# Altium PCB Sampler_DIOT.PCBDOC (part 6 of 10)
Units mm, origin at the board's own origin, x right, y up, seen from the top; angles counter-clockwise.
Board outline 222.9 x 100 mm, 4 copper layers (L1, P2, L3, L4), stack 1.6 mm thick; 697 components, 418 nets, 2175 pads, 1124 vias.
Unrouted connection lines stored in the file: 6.
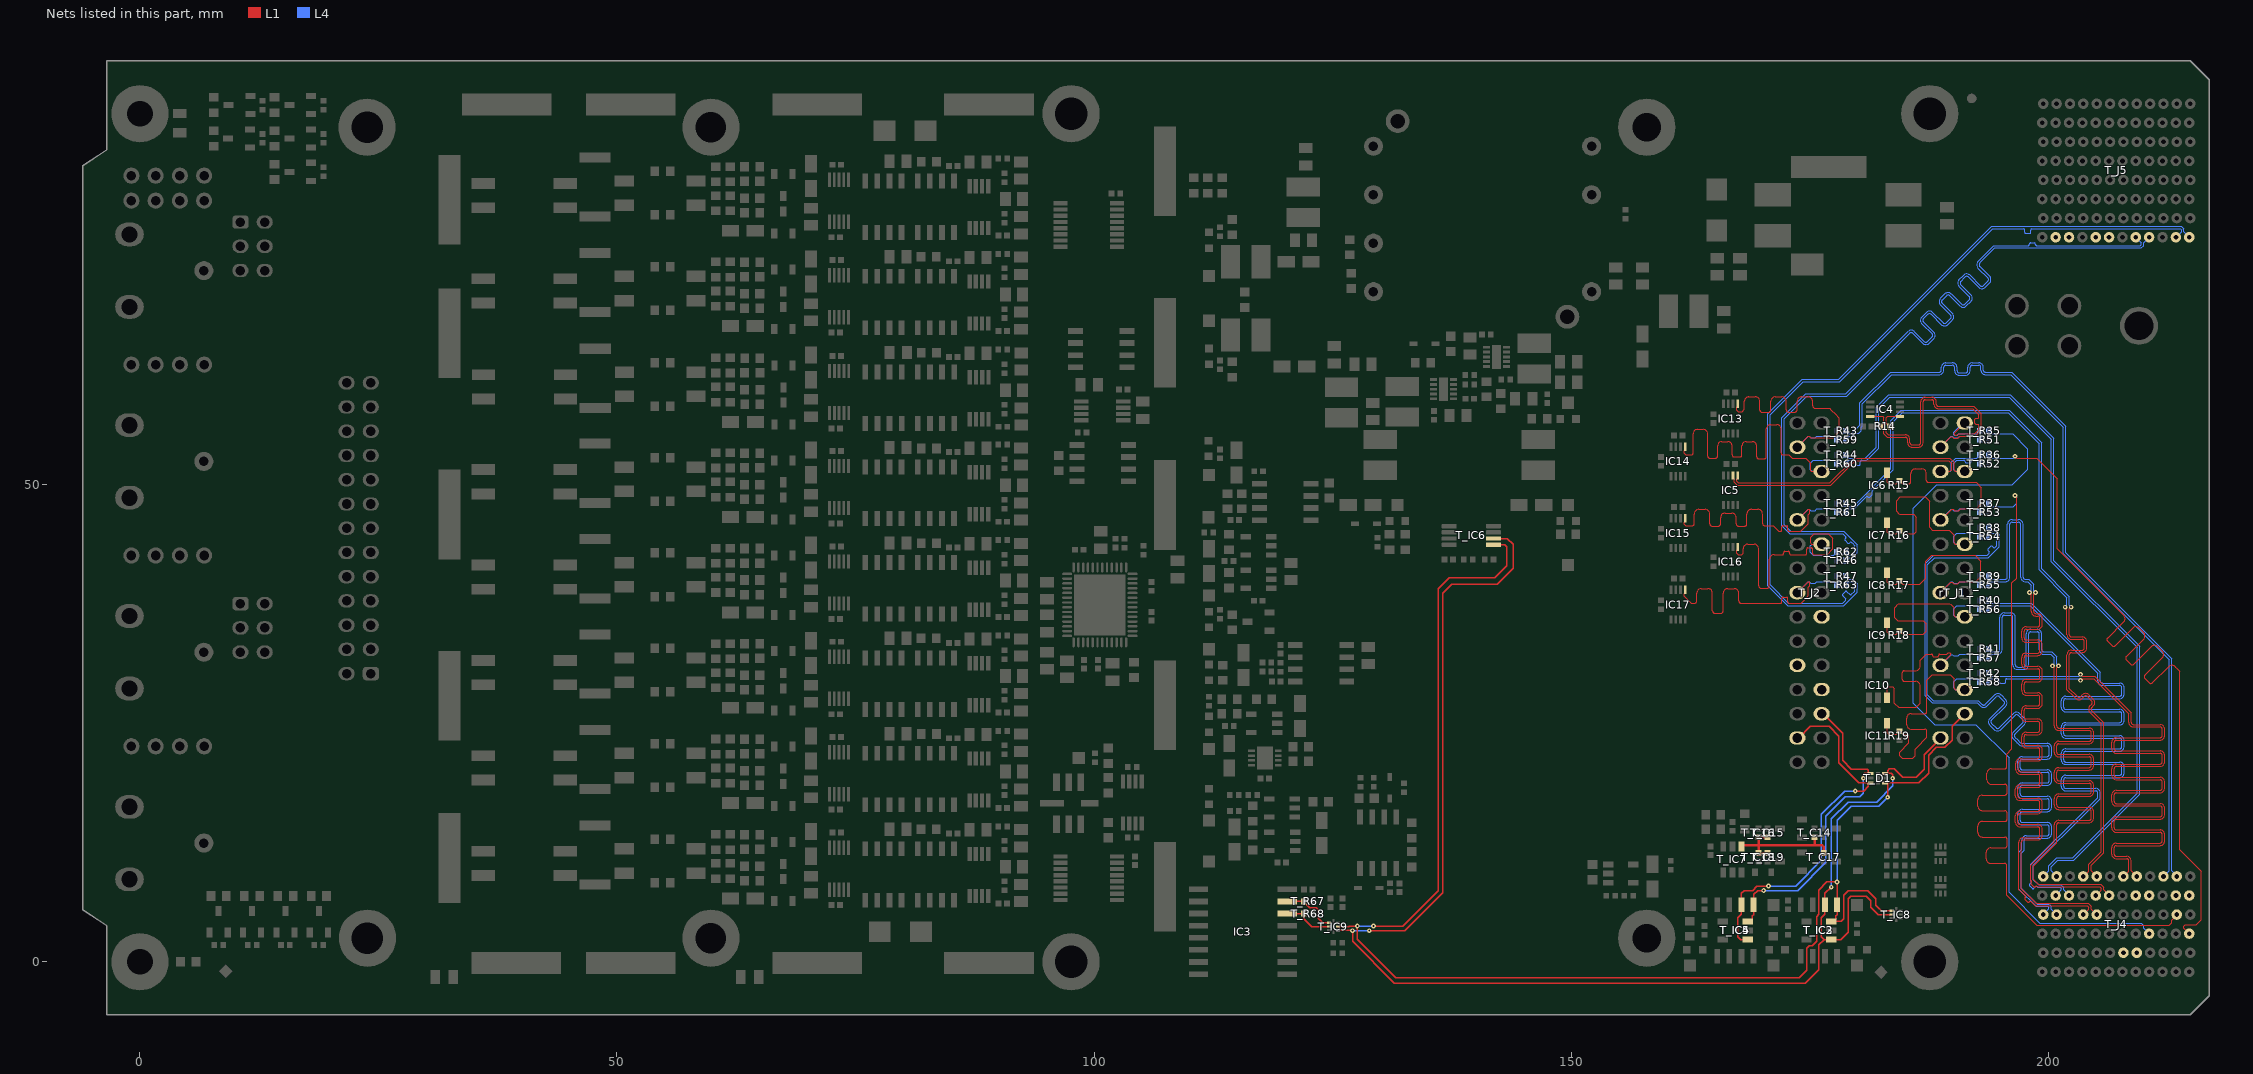
[diagram p6: the nets of this part, all layers, seen from the top]

## Via types
v1: diameter 0.5, hole 0.2, L1 to L4, tented both sides, 1103 vias
v2: diameter 1, hole 0.6, L1 to L4, tented both sides, 15 vias
v3: diameter 0.6, hole 0.3, L1 to L4, tented both sides, 6 vias

## Nets (pads, with @x,y where several pads share a name; then routed paths per layer and width w, separated by ;. In a path a pad name is that pad's centre, name@x,y a point inside that pad or via, vN(x,y) a via of type N, cw(c..) or ccw(c..) an arc to the next point about the centre after c; other vN are vias at no path point) (continued)
BP_IO.LVDS_N3: T_J4.L4 T_R54.1 | length 89.3
  L4 w0.127: T_R54.1@193.796,44.589 193.796,44.609 194.117,44.93 194.392,44.93 194.65,44.672 194.65,43.785 194.65,43.63 194.449,43.428 cw(c194.359,43.518) 194.269,43.428 194.154,43.544 ccw(c194.065,43.455) 193.976,43.544 193.71,43.278 ccw(c193.799,43.189) 193.71,43.101 193.826,42.985 cw(c193.736,42.895) 193.826,42.806 193.781,42.761 193.647,42.627 188.002,42.627 187.108,41.733 187.108,27.867 187.839,27.136 192.589,27.136 192.788,26.937 192.886,26.839 192.923,26.802 ccw(c193.262,27.141) 193.601,26.802 194.589,27.791 cw(c194.748,27.631) 194.908,27.789 195.385,27.313 cw(c195.226,27.152) 195.385,26.993 193.891,25.499 ccw(c194.229,25.159) 193.89,24.82 194.368,24.342 ccw(c194.707,24.681) 195.046,24.342 196.542,25.838 cw(c196.701,25.678) 196.861,25.836 ; 196.861,25.836 197.338,25.36 ; 196.874,22.851 196.761,22.964 196.743,22.982 196.724,23.001 196.645,23.08 196.351,23.374 cw(c196.69,23.713) 196.351,24.052 197.338,25.04 ccw(c197.179,25.199) 197.338,25.359 ; 196.875,22.85 ccw(c197.389,23.367) 197.389,22.638 199.9,22.638 cw(c199.9,22.413) 200.125,22.413 200.125,21.736 cw(c199.9,21.736) 199.9,21.511 197.304,21.511 ccw(c197.304,21.032) 196.825,21.032 196.825,20.355 ccw(c197.304,20.355) 197.304,19.876 199.9,19.876 cw(c199.9,19.651) 200.125,19.651 200.125,18.974 cw(c199.9,18.974) 199.9,18.749 197.304,18.749 ccw(c197.304,18.27) 196.825,18.27 196.825,17.593 ccw(c197.304,17.593) 197.304,17.114 199.9,17.114 cw(c199.9,16.889) 200.125,16.889 200.125,16.212 cw(c199.9,16.212) 199.9,15.987 197.304,15.987 ccw(c197.304,15.508) 196.825,15.508 196.825,14.831 ccw(c197.304,14.831) 197.304,14.352 199.9,14.352 cw(c199.9,14.127) 200.125,14.127 200.125,13.45 cw(c199.9,13.45) 199.9,13.225 197.726,13.225 ccw(c197.726,12.746) 197.247,12.746 197.247,11.781 196.931,11.465 196.931,11.067 196.931,7.618 198.745,5.803 199.981,5.803 200.093,5.691 200.093,5.543 T_J4.L4@199.5,4.95
BP_IO.LVDS_N4: T_J4.I4 T_R55.1 | length 90.2
  L1 w0.127: v1(198.059,38.699) 198.07,38.699 198.246,38.522 198.246,36.917 198.246,36.727 ccw(c198.725,36.727) 198.725,36.247 198.913,36.247 cw(c198.913,36.022) 199.139,36.022 199.139,35.346 cw(c198.913,35.346) 198.913,35.12 197.709,35.12 ccw(c197.709,34.641) 197.229,34.641 197.229,33.965 ccw(c197.709,33.965) 197.709,33.485 198.913,33.485 cw(c198.913,33.26) 199.139,33.26 199.139,32.584 cw(c198.913,32.584) 198.913,32.358 197.709,32.358 ccw(c197.709,31.879) 197.229,31.879 197.229,31.203 ccw(c197.709,31.203) 197.709,30.723 198.913,30.723 cw(c198.913,30.498) 199.139,30.498 199.139,29.822 cw(c198.913,29.822) 198.913,29.596 197.709,29.596 ccw(c197.709,29.117) 197.229,29.117 197.229,28.441 ccw(c197.709,28.441) 197.709,27.961 198.913,27.961 cw(c198.913,27.736) 199.139,27.736 199.139,27.06 cw(c198.913,27.06) 198.913,26.834 197.709,26.834 ccw(c197.709,26.355) 197.229,26.355 197.229,25.679 ccw(c197.709,25.679) 197.709,25.199 198.913,25.199 cw(c198.913,24.974) 199.139,24.974 199.139,24.298 cw(c198.913,24.298) 198.913,24.072 197.709,24.072 ccw(c197.709,23.593) 197.229,23.593 197.229,22.917 ccw(c197.709,22.917) 197.709,22.437 198.913,22.437 cw(c198.913,22.212) 199.139,22.212 199.139,21.536 cw(c198.913,21.536) 198.913,21.31 197.095,21.31 ccw(c197.095,20.831) 196.616,20.831 196.616,20.155 ccw(c197.095,20.155) 197.095,19.675 198.913,19.675 cw(c198.913,19.45) 199.139,19.45 199.139,18.774 cw(c198.913,18.774) 198.913,18.548 197.053,18.548 ccw(c197.053,18.069) 196.574,18.069 196.574,17.393 ccw(c197.053,17.393) 197.053,16.913 198.913,16.913 cw(c198.913,16.688) 199.139,16.688 199.139,16.012 cw(c198.913,16.012) 198.913,15.786 197.053,15.786 ccw(c197.053,15.307) 196.574,15.307 196.574,14.631 ccw(c197.053,14.631) 197.053,14.151 198.913,14.151 cw(c198.913,13.926) 199.139,13.926 199.139,13.25 cw(c198.913,13.25) 198.913,13.024 197.425,13.024 ccw(c197.425,12.545) 196.946,12.545 196.946,10.175 196.946,7.579 197.1,7.425 197.145,7.38 197.614,6.911 cw(c197.524,6.821) 197.614,6.731 197.589,6.706 ccw(c197.677,6.617) 197.589,6.528 197.855,6.262 ccw(c197.943,6.351) 198.032,6.262 198.058,6.288 cw(c198.147,6.198) 198.237,6.288 198.282,6.243 198.652,5.873 204.099,5.873 204.262,5.709 204.262,5.512 T_J4.I4@203.7,4.95
  L4 w0.127: T_R55.1@193.796,39.509 193.796,39.529 194.117,39.85 195.333,39.85 195.523,39.85 ccw(c195.523,40.33) 196.003,40.33 196.003,45.861 cw(c196.228,45.861) 196.228,46.086 196.904,46.086 cw(c196.904,45.861) 197.13,45.861 197.13,40.33 ccw(c197.609,40.33) 197.609,39.85 197.86,39.85 198.232,39.479 198.246,39.465 198.246,38.875 198.07,38.699 v1(198.059,38.699)
BP_IO.LVDS_N5: T_J4.K5 T_R56.1 | length 92.5
  L4 w0.127: T_R56.1@193.796,36.969 193.796,36.989 194.117,37.31 198.138,37.31 205.221,30.228 205.221,29.641 205.221,29.45 ccw(c205.7,29.45) 205.7,28.971 207.506,28.971 cw(c207.506,28.745) 207.732,28.745 207.732,28.069 cw(c207.506,28.069) 207.506,27.844 201.856,27.844 ccw(c201.856,27.364) 201.376,27.364 201.376,26.688 ccw(c201.856,26.688) 201.856,26.209 207.506,26.209 cw(c207.506,25.983) 207.732,25.983 207.732,25.307 cw(c207.506,25.307) 207.506,25.082 201.856,25.082 ccw(c201.856,24.602) 201.376,24.602 201.376,23.926 ccw(c201.856,23.926) 201.856,23.447 207.506,23.447 cw(c207.506,23.221) 207.732,23.221 207.732,22.545 cw(c207.506,22.545) 207.506,22.32 201.856,22.32 ccw(c201.856,21.84) 201.376,21.84 201.376,21.164 ccw(c201.856,21.164) 201.856,20.685 207.506,20.685 cw(c207.506,20.459) 207.732,20.459 207.732,19.783 cw(c207.506,19.783) 207.506,19.558 201.856,19.558 ccw(c201.856,19.078) 201.376,19.078 201.376,18.402 ccw(c201.856,18.402) 201.856,17.923 204.996,17.923 cw(c204.996,17.697) 205.221,17.697 205.221,17.216 203.905,15.9 198.208,10.203 198.208,8.866 198.208,8.502 198.23,8.479 cw(c198.141,8.389) 198.23,8.299 198.071,8.14 ccw(c198.16,8.052) 198.071,7.963 198.337,7.697 ccw(c198.426,7.786) 198.515,7.697 198.674,7.856 cw(c198.764,7.766) 198.853,7.856 198.898,7.811 198.906,7.803 201.281,7.803 201.393,7.691 201.393,7.543 T_J4.K5@200.8,6.95
BP_IO.LVDS_N6: T_J4.H5 T_R57.1 | length 84.2
  L1 w0.127: v1(200.467,31.024) 200.477,31.024 200.653,30.847 200.653,30 200.653,24.726 ccw(c201.133,24.726) 201.133,24.247 204.305,24.247 cw(c204.305,24.022) 204.531,24.022 204.531,23.345 cw(c204.305,23.345) 204.305,23.12 201.127,23.12 ccw(c201.127,22.641) 200.648,22.641 200.648,21.964 ccw(c201.127,21.964) 201.127,21.485 204.305,21.485 cw(c204.305,21.26) 204.531,21.26 204.531,20.583 cw(c204.305,20.583) 204.305,20.358 201.127,20.358 ccw(c201.127,19.879) 200.648,19.879 200.648,19.202 ccw(c201.127,19.202) 201.127,18.723 204.305,18.723 cw(c204.305,18.498) 204.531,18.498 204.531,17.821 cw(c204.305,17.821) 204.305,17.596 201.127,17.596 ccw(c201.127,17.117) 200.648,17.117 200.648,16.44 ccw(c201.127,16.44) 201.127,15.961 204.305,15.961 cw(c204.305,15.736) 204.531,15.736 204.531,15.059 cw(c204.305,15.059) 204.305,14.834 201.133,14.834 ccw(c201.133,14.355) 200.653,14.355 200.653,12.783 200.653,12.566 198.213,10.125 198.213,8.919 198.213,8.528 198.231,8.51 cw(c198.141,8.42) 198.231,8.33 198.22,8.32 ccw(c198.309,8.231) 198.22,8.142 198.486,7.876 ccw(c198.575,7.965) 198.663,7.876 198.674,7.887 cw(c198.764,7.797) 198.854,7.887 198.868,7.873 198.93,7.873 205.399,7.873 205.562,7.709 205.562,7.512 T_J4.H5@205,6.95
  L4 w0.127: T_R57.1@193.796,31.889 193.796,31.909 194.117,32.23 194.525,32.23 194.716,32.23 ccw(c194.716,32.71) 195.195,32.71 195.195,36.105 cw(c195.42,36.105) 195.42,36.33 196.097,36.33 cw(c196.097,36.105) 196.322,36.105 196.322,31.127 ccw(c196.801,31.127) 196.801,30.647 197.478,30.647 ccw(c197.478,31.127) 197.957,31.127 197.957,34.367 cw(c198.182,34.367) 198.182,34.592 198.859,34.592 cw(c198.859,34.367) 199.084,34.367 199.084,32.71 ccw(c199.563,32.71) 199.563,32.23 200.285,32.23 200.475,32.041 200.653,31.863 200.653,31.2 200.477,31.024 v1(200.467,31.024)
BP_IO.LVDS_N7: T_J4.F6 T_R58.1 | length 84.2
  L1 w0.127: v1(203.401,29.504) 203.401,29.514 203.578,29.69 204.773,29.69 208.462,26.001 208.462,25.289 208.462,25.098 ccw(c208.942,25.098) 208.942,24.619 211.737,24.619 cw(c211.737,24.393) 211.963,24.393 211.963,23.717 cw(c211.737,23.717) 211.737,23.492 207.154,23.492 ccw(c207.154,23.012) 206.675,23.012 206.675,22.336 ccw(c207.154,22.336) 207.154,21.857 211.737,21.857 cw(c211.737,21.631) 211.963,21.631 211.963,20.955 cw(c211.737,20.955) 211.737,20.73 207.154,20.73 ccw(c207.154,20.25) 206.675,20.25 206.675,19.574 ccw(c207.154,19.574) 207.154,19.095 211.737,19.095 cw(c211.737,18.869) 211.963,18.869 211.963,18.193 cw(c211.737,18.193) 211.737,17.968 207.154,17.968 ccw(c207.154,17.488) 206.675,17.488 206.675,16.812 ccw(c207.154,16.812) 207.154,16.333 211.737,16.333 cw(c211.737,16.107) 211.963,16.107 211.963,15.431 cw(c211.737,15.431) 211.737,15.206 207.154,15.206 ccw(c207.154,14.726) 206.675,14.726 206.675,14.05 ccw(c207.154,14.05) 207.154,13.571 211.737,13.571 cw(c211.737,13.345) 211.963,13.345 211.963,12.669 cw(c211.737,12.669) 211.737,12.444 207.154,12.444 ccw(c207.154,11.964) 206.675,11.964 206.675,11.288 ccw(c207.154,11.288) 207.154,10.809 208.237,10.809 cw(c208.237,10.583) 208.462,10.583 208.462,10.004 208.462,9.512 T_J4.F6@207.9,8.95
  L4 w0.127: T_R58.1@193.796,29.349 193.796,29.369 194.1,29.673 194.117,29.69 194.791,29.69 cw(c194.791,29.563) 194.918,29.563 194.918,29.305 ccw(c195.043,29.305) 195.043,29.179 195.419,29.179 ccw(c195.419,29.305) 195.545,29.305 195.545,29.563 cw(c195.672,29.563) 195.672,29.69 195.971,29.69 203.225,29.69 203.401,29.514 v1(203.401,29.504)
BP_IO.LVDS_N8: T_J4.C6 T_R59.1 | length 84.3
  L4 w0.127: T_R59.1@178.796,54.749 178.796,54.769 179.008,54.981 179.117,55.09 179.47,55.09 179.798,55.419 179.975,55.419 179.978,55.416 180.155,55.416 180.421,55.682 180.421,55.86 180.419,55.862 180.419,56.039 180.527,56.148 180.527,56.187 180.527,58.479 183.596,61.549 188.409,61.549 188.599,61.549 ccw(c188.599,62.028) 189.079,62.028 189.079,62.309 cw(c189.304,62.309) 189.304,62.534 189.98,62.534 cw(c189.98,62.309) 190.206,62.309 190.206,61.967 ccw(c190.685,61.967) 190.685,61.487 191.361,61.487 ccw(c191.361,61.967) 191.841,61.967 191.841,62.309 cw(c192.066,62.309) 192.066,62.534 192.742,62.534 cw(c192.742,62.309) 192.968,62.309 192.968,62.028 ccw(c193.447,62.028) 193.447,61.549 195.128,61.549 196.089,61.549 201.6,56.038 201.6,42.766 212.693,31.672 212.693,9.543 T_J4.C6@212.1,8.95
BP_IO.LVDS_N9: T_J4.L6 T_R60.1 | length 84.2
  L4 w0.127: T_R60.1@178.796,52.209 178.796,52.229 179.086,52.519 179.117,52.55 179.676,52.55 cw(c179.676,52.423) 179.803,52.423 179.803,52.179 ccw(c179.909,52.179) 179.909,52.073 180.225,52.073 ccw(c180.225,52.179) 180.33,52.179 180.33,52.423 cw(c180.457,52.423) 180.457,52.55 180.735,52.55 180.962,52.55 181.111,52.699 182.103,53.691 182.252,53.84 182.252,58.04 183.412,59.2 195.949,59.2 200.357,54.792 200.357,41.959 209.359,32.957 209.359,17.644 202.608,10.893 200.923,10.893 200.093,10.064 200.093,9.543 T_J4.L6@199.5,8.95
BP_IO.LVDS_N10: T_J4.I6 T_R61.1 | length 82.6
  L1 w0.127: v1(201.798,37.174) 201.809,37.174 201.985,36.997 201.985,34.469 201.985,34.278 ccw(c202.464,34.278) 202.464,33.799 203.582,33.799 cw(c203.582,33.573) 203.807,33.573 203.807,32.897 cw(c203.582,32.897) 203.582,32.672 202.464,32.672 ccw(c202.464,32.192) 201.985,32.192 201.985,31.538 201.985,28.54 202.625,27.9 202.778,27.747 202.875,27.65 202.912,27.613 ccw(c203.251,27.952) 203.59,27.613 203.788,27.811 cw(c203.948,27.651) 204.107,27.811 204.585,27.332 cw(c204.426,27.173) 204.585,27.014 ; T_J4.I6@203.7,8.95 204.262,9.512 204.262,10.222 205.575,11.534 205.575,24.95 205.453,25.072 205.355,25.17 204.387,26.138 cw(c204.726,26.477) 204.387,26.816 204.585,27.013
  L4 w0.127: T_R61.1@178.796,47.129 178.796,47.149 179.117,47.47 179.675,47.47 180.44,48.235 180.928,48.723 cw(c181.018,48.634) 181.108,48.723 181.12,48.711 ccw(c181.209,48.8) 181.297,48.711 181.563,48.977 ccw(c181.475,49.066) 181.563,49.154 181.551,49.167 cw(c181.641,49.257) 181.551,49.346 181.748,49.544 183.77,51.566 183.77,56.63 184.694,57.554 195.805,57.554 199.065,54.294 199.065,41.076 201.985,38.156 201.985,37.35 201.809,37.174 v1(201.798,37.174)
BP_IO.LVDS_N11: T_J5.E1 T_R62.1 | length 84.1
  L4 w0.127: T_R62.1@178.796,42.971 178.796,42.951 179.117,42.629 179.418,42.629 179.651,42.862 179.741,42.953 179.741,43.621 179.456,43.906 179.411,43.951 ccw(c179.321,43.861) 179.231,43.951 179.178,43.898 cw(c179.09,43.986) 179.001,43.898 178.735,44.164 cw(c178.824,44.252) 178.735,44.341 178.788,44.394 ccw(c178.698,44.484) 178.788,44.574 178.688,44.673 178.643,44.718 178.485,44.876 172.902,44.876 172.085,45.694 172.085,47.284 172.09,47.289 172.09,57.024 174.595,59.529 178.779,59.529 184.334,65.084 185.319,66.069 cw(c185.658,65.73) 185.955,66.106 185.96,66.106 185.997,66.07 ; 185.997,66.069 187.045,65.021 ccw(c187.205,65.18) 187.364,65.021 187.842,65.499 ccw(c187.683,65.659) 187.842,65.818 ; 187.841,65.819 186.76,66.9 cw(c187.098,67.24) 186.76,67.58 187.238,68.057 cw(c187.577,67.718) 187.874,68.094 187.878,68.094 188.998,66.974 ccw(c189.158,67.133) 189.317,66.974 189.795,67.452 ccw(c189.636,67.612) 189.795,67.771 ; 189.794,67.772 188.713,68.853 cw(c189.051,69.193) 188.713,69.533 189.191,70.01 cw(c189.53,69.671) 189.827,70.047 189.831,70.047 190.951,68.927 ccw(c191.111,69.087) 191.27,68.927 191.748,69.405 ccw(c191.589,69.565) 191.748,69.724 ; 191.747,69.725 190.666,70.806 cw(c191.004,71.146) 190.666,71.486 191.144,71.963 cw(c191.483,71.624) 191.78,72 191.784,72 192.904,70.88 ccw(c193.064,71.04) 193.223,70.88 193.701,71.358 ccw(c193.542,71.518) 193.701,71.677 ; 193.7,71.678 192.653,72.725 cw(c192.992,73.064) 192.653,73.403 192.788,73.538 194.326,75.076 197.858,75.076 197.921,75.076 ccw(c197.921,75.203) 198.048,75.203 198.048,75.226 cw(c198.174,75.226) 198.174,75.352 198.55,75.352 cw(c198.55,75.226) 198.675,75.226 198.675,75.203 ccw(c198.802,75.203) 198.802,75.076 199.18,75.076 209.681,75.076 209.793,75.188 209.793,75.357 T_J5.E1@209.2,75.95
BP_IO.LVDS_N12: T_J5.B1 T_R63.1 | length 84
  L4 w0.127: T_R63.1@178.796,39.509 178.796,39.529 179.117,39.85 179.418,39.85 179.651,39.617 179.741,39.527 179.741,39.06 179.741,38.859 179.399,38.517 cw(c179.309,38.607) 179.219,38.517 178.926,38.811 ccw(c178.837,38.722) 178.748,38.811 178.482,38.545 ccw(c178.571,38.456) 178.482,38.367 178.776,38.074 cw(c178.686,37.984) 178.776,37.894 178.486,37.604 178.342,37.604 172.795,37.604 170.875,39.523 170.875,57.35 174.342,60.817 178.188,60.817 194.195,76.824 196.743,76.824 197.433,76.824 cw(c197.433,76.697) 197.56,76.697 197.56,76.467 ccw(c197.686,76.467) 197.686,76.342 198.062,76.342 ccw(c198.062,76.467) 198.187,76.467 198.187,76.697 cw(c198.314,76.697) 198.314,76.824 198.85,76.824 199.131,76.824 213.881,76.824 213.993,76.712 213.993,76.543 T_J5.B1@213.4,75.95
BP_IO.LVDS_N13: T_J5.K1
BP_IO.LVDS_N14: T_J5.H1
BP_IO.LVDS_N15: T_J4.F2
BP_IO.LVDS_P0: T_J4.D3 T_R35.1 | length 84.3
  L4 w0.127: T_R35.1@193.796,55.668 193.796,55.648 194.023,55.422 194.043,55.422 194.12,55.344 196.277,55.344 197.783,53.839 197.857,53.764 197.857,51.61 196.243,49.996 188.314,49.996 185.867,47.549 185.867,27.129 188.141,24.854 192.438,24.854 195.92,21.372 195.92,21.267 195.92,7.27 199.133,4.057 209.786,4.057 210.047,3.796 210.047,3.531 210.6,2.978 T_J4.D3@210.6,2.95
BP_IO.LVDS_P1: T_J4.A3 T_R36.1 | length 81.6
  L1 w0.127: v1(196.551,52.991) 196.551,52.981 196.728,52.804 198.805,52.804 200.978,50.631 200.978,43.272 207.035,37.215 207.133,37.117 207.934,36.316 207.972,36.278 207.972,36.274 cw(c207.595,35.977) 207.934,35.638 206.237,33.94 ccw(c206.397,33.781) 206.237,33.622 206.716,33.144 ccw(c206.875,33.303) 207.034,33.144 208.867,34.976 cw(c209.207,34.638) 209.504,35.014 209.508,35.014 209.545,34.978 210.024,34.499 ; 210.024,34.498 210.061,34.462 210.061,34.457 cw(c209.685,34.16) 210.024,33.821 208.19,31.987 ccw(c208.35,31.828) 208.19,31.669 208.669,31.191 ccw(c208.828,31.35) 208.987,31.191 210.82,33.023 cw(c211.16,32.685) 211.457,33.061 211.461,33.061 211.498,33.025 211.977,32.546 212.014,32.509 212.014,32.504 cw(c211.638,32.207) 211.977,31.868 210.143,30.034 ccw(c210.303,29.875) 210.143,29.716 210.622,29.238 ccw(c210.781,29.397) 210.94,29.238 212.637,30.935 cw(c212.976,30.596) 213.273,30.972 213.278,30.972 213.315,30.935 ; 213.315,30.935 213.352,30.898 213.45,30.8 213.751,30.499 213.825,30.425 213.825,11.75 216.065,9.51 216.065,4.387 215.551,3.873 214.401,3.873 214.238,3.709 214.238,3.512 T_J4.A3@214.8,2.95
  L4 w0.127: T_R36.1@193.796,53.128 193.796,53.108 194.023,52.882 194.043,52.882 194.12,52.804 196.375,52.804 196.551,52.981 v1(196.551,52.991)
BP_IO.LVDS_P2: T_J4.B4 T_R37.1 | length 84.6
  L1 w0.127: v1(196.524,48.882) 196.524,48.795 196.699,48.621 196.699,40.224 196.222,39.747 196.222,22.328 195.673,21.778 195.673,21.113 195.673,20.464 cw(c195.448,20.464) 195.448,20.238 194.07,20.238 ccw(c194.07,19.759) 193.59,19.759 193.59,19.083 ccw(c194.07,19.083) 194.07,18.603 195.484,18.603 cw(c195.484,18.378) 195.71,18.378 195.71,17.702 cw(c195.484,17.702) 195.484,17.476 193.124,17.476 ccw(c193.124,16.997) 192.645,16.997 192.645,16.321 ccw(c193.124,16.321) 193.124,15.841 195.484,15.841 cw(c195.484,15.616) 195.71,15.616 195.71,14.94 cw(c195.484,14.94) 195.484,14.714 193.124,14.714 ccw(c193.124,14.235) 192.645,14.235 192.645,13.559 ccw(c193.124,13.559) 193.124,13.079 195.484,13.079 cw(c195.484,12.854) 195.71,12.854 195.71,12.178 cw(c195.484,12.178) 195.484,11.952 194.003,11.952 ccw(c194.003,11.473) 193.523,11.473 193.523,10.797 ccw(c194.003,10.797) 194.003,10.317 195.448,10.317 cw(c195.448,10.092) 195.673,10.092 195.673,9.901 195.673,6.977 198.807,3.843 212.686,3.843 212.947,4.104 212.947,4.369 213.5,4.922 T_J4.B4@213.5,4.95
  L4 w0.127: T_R37.1@193.796,48.048 193.796,48.028 194.023,47.802 194.043,47.802 194.12,47.724 196.344,47.724 196.711,48.091 196.711,48.705 196.535,48.882 v1(196.524,48.882)
BP_IO.LVDS_P3: T_J4.K4 T_R38.1 | length 89.1
  L4 w0.127: T_R38.1@193.796,45.508 193.796,45.488 194.023,45.262 194.043,45.262 194.12,45.184 194.497,45.184 194.904,44.778 194.904,43.524 193.753,42.373 188.107,42.373 187.362,41.628 187.362,27.972 187.944,27.39 192.694,27.39 192.968,27.117 193.065,27.019 193.102,26.982 ccw(c193.262,27.141) 193.421,26.982 194.408,27.969 ; 194.408,27.969 cw(c194.748,27.631) 195.045,28.007 195.05,28.007 195.086,27.97 ; 195.087,27.97 195.565,27.491 ; 195.566,27.491 195.602,27.454 195.602,27.45 cw(c195.226,27.152) 195.565,26.813 194.069,25.317 ccw(c194.229,25.159) 194.07,24.999 194.548,24.521 ccw(c194.707,24.681) 194.867,24.521 196.361,26.016 ; 196.362,26.016 cw(c196.701,25.678) 196.998,26.054 197.003,26.054 197.039,26.017 ; 197.04,26.017 197.518,25.538 ; 197.519,25.538 197.555,25.501 197.555,25.497 cw(c197.179,25.199) 197.518,24.86 196.53,23.873 ccw(c196.69,23.713) 196.53,23.554 196.825,23.259 196.922,23.162 196.952,23.132 197.052,23.032 197.055,23.029 ccw(c197.389,23.367) 197.389,22.892 199.9,22.892 cw(c199.9,22.413) 200.379,22.413 200.379,21.736 cw(c199.9,21.736) 199.9,21.257 197.304,21.257 ccw(c197.304,21.032) 197.079,21.032 197.079,20.355 ccw(c197.304,20.355) 197.304,20.13 199.9,20.13 cw(c199.9,19.651) 200.379,19.651 200.379,18.974 cw(c199.9,18.974) 199.9,18.495 197.304,18.495 ccw(c197.304,18.27) 197.079,18.27 197.079,17.593 ccw(c197.304,17.593) 197.304,17.368 199.9,17.368 cw(c199.9,16.889) 200.379,16.889 200.379,16.212 cw(c199.9,16.212) 199.9,15.733 197.304,15.733 ccw(c197.304,15.508) 197.079,15.508 197.079,14.831 ccw(c197.304,14.831) 197.304,14.606 199.9,14.606 cw(c199.9,14.127) 200.379,14.127 200.379,13.45 cw(c199.9,13.45) 199.9,12.971 197.726,12.971 ccw(c197.726,12.746) 197.501,12.746 197.501,11.676 197.185,11.36 197.185,11.067 197.185,7.723 198.85,6.057 200.086,6.057 200.161,5.983 200.347,5.796 200.347,5.531 200.9,4.978 T_J4.K4@200.9,4.95
BP_IO.LVDS_P4: T_J4.H4 T_R39.1 | length 90.2
  L1 w0.127: v1(198.686,38.699) 198.676,38.699 198.5,38.522 198.5,36.917 198.5,36.727 ccw(c198.725,36.727) 198.725,36.501 198.913,36.501 cw(c198.913,36.022) 199.393,36.022 199.393,35.346 cw(c198.913,35.346) 198.913,34.866 197.709,34.866 ccw(c197.709,34.641) 197.483,34.641 197.483,33.965 ccw(c197.709,33.965) 197.709,33.739 198.913,33.739 cw(c198.913,33.26) 199.393,33.26 199.393,32.584 cw(c198.913,32.584) 198.913,32.104 197.709,32.104 ccw(c197.709,31.879) 197.483,31.879 197.483,31.203 ccw(c197.709,31.203) 197.709,30.977 198.913,30.977 cw(c198.913,30.498) 199.393,30.498 199.393,29.822 cw(c198.913,29.822) 198.913,29.342 197.709,29.342 ccw(c197.709,29.117) 197.483,29.117 197.483,28.441 ccw(c197.709,28.441) 197.709,28.215 198.913,28.215 cw(c198.913,27.736) 199.393,27.736 199.393,27.06 cw(c198.913,27.06) 198.913,26.58 197.709,26.58 ccw(c197.709,26.355) 197.483,26.355 197.483,25.679 ccw(c197.709,25.679) 197.709,25.453 198.913,25.453 cw(c198.913,24.974) 199.393,24.974 199.393,24.298 cw(c198.913,24.298) 198.913,23.818 197.709,23.818 ccw(c197.709,23.593) 197.483,23.593 197.483,22.917 ccw(c197.709,22.917) 197.709,22.691 198.913,22.691 cw(c198.913,22.212) 199.393,22.212 199.393,21.536 cw(c198.913,21.536) 198.913,21.056 197.095,21.056 ccw(c197.095,20.831) 196.87,20.831 196.87,20.155 ccw(c197.095,20.155) 197.095,19.929 198.913,19.929 cw(c198.913,19.45) 199.393,19.45 199.393,18.774 cw(c198.913,18.774) 198.913,18.294 197.053,18.294 ccw(c197.053,18.069) 196.828,18.069 196.828,17.393 ccw(c197.053,17.393) 197.053,17.167 198.913,17.167 cw(c198.913,16.688) 199.393,16.688 199.393,16.012 cw(c198.913,16.012) 198.913,15.532 197.053,15.532 ccw(c197.053,15.307) 196.828,15.307 196.828,14.631 ccw(c197.053,14.631) 197.053,14.405 198.913,14.405 cw(c198.913,13.926) 199.393,13.926 199.393,13.25 cw(c198.913,13.25) 198.913,12.77 197.425,12.77 ccw(c197.425,12.545) 197.2,12.545 197.2,10.175 197.2,7.684 198.757,6.127 204.204,6.127 204.516,5.814 204.516,5.534 T_J4.H4@205.1,4.95
  L4 w0.127: T_R39.1@193.796,40.428 193.796,40.408 194.023,40.182 194.043,40.182 194.12,40.104 195.333,40.104 195.523,40.104 ccw(c195.523,40.33) 195.749,40.33 195.749,45.861 cw(c196.228,45.861) 196.228,46.34 196.904,46.34 cw(c196.904,45.861) 197.384,45.861 197.384,40.33 ccw(c197.609,40.33) 197.609,40.104 197.965,40.104 198.232,39.838 198.5,39.57 198.5,38.875 198.676,38.699 v1(198.686,38.699)
BP_IO.LVDS_P5: T_J4.J5 T_R40.1 | length 92.2
  L4 w0.127: T_R40.1@193.796,37.888 193.796,37.868 194.023,37.642 194.043,37.642 194.12,37.564 198.243,37.564 205.475,30.333 205.475,29.641 205.475,29.45 ccw(c205.7,29.45) 205.7,29.225 207.506,29.225 cw(c207.506,28.745) 207.986,28.745 207.986,28.069 cw(c207.506,28.069) 207.506,27.59 201.856,27.59 ccw(c201.856,27.364) 201.63,27.364 201.63,26.688 ccw(c201.856,26.688) 201.856,26.463 207.506,26.463 cw(c207.506,25.983) 207.986,25.983 207.986,25.307 cw(c207.506,25.307) 207.506,24.828 201.856,24.828 ccw(c201.856,24.602) 201.63,24.602 201.63,23.926 ccw(c201.856,23.926) 201.856,23.701 207.506,23.701 cw(c207.506,23.221) 207.986,23.221 207.986,22.545 cw(c207.506,22.545) 207.506,22.066 201.856,22.066 ccw(c201.856,21.84) 201.63,21.84 201.63,21.164 ccw(c201.856,21.164) 201.856,20.939 207.506,20.939 cw(c207.506,20.459) 207.986,20.459 207.986,19.783 cw(c207.506,19.783) 207.506,19.304 201.856,19.304 ccw(c201.856,19.078) 201.63,19.078 201.63,18.402 ccw(c201.856,18.402) 201.856,18.177 204.996,18.177 cw(c204.996,17.697) 205.475,17.697 205.475,17.111 204.264,15.9 198.462,10.097 198.462,8.607 199.012,8.057 201.386,8.057 201.461,7.983 201.647,7.796 201.647,7.531 202.2,6.978 T_J4.J5@202.2,6.95
BP_IO.LVDS_P6: T_J4.G5 T_R41.1 | length 84.3
  L1 w0.127: v1(201.094,31.024) 201.083,31.024 200.907,30.847 200.907,30 200.907,24.726 ccw(c201.133,24.726) 201.133,24.501 204.305,24.501 cw(c204.305,24.022) 204.785,24.022 204.785,23.345 cw(c204.305,23.345) 204.305,22.866 201.127,22.866 ccw(c201.127,22.641) 200.902,22.641 200.902,21.964 ccw(c201.127,21.964) 201.127,21.739 204.305,21.739 cw(c204.305,21.26) 204.785,21.26 204.785,20.583 cw(c204.305,20.583) 204.305,20.104 201.127,20.104 ccw(c201.127,19.879) 200.902,19.879 200.902,19.202 ccw(c201.127,19.202) 201.127,18.977 204.305,18.977 cw(c204.305,18.498) 204.785,18.498 204.785,17.821 cw(c204.305,17.821) 204.305,17.342 201.127,17.342 ccw(c201.127,17.117) 200.902,17.117 200.902,16.44 ccw(c201.127,16.44) 201.127,16.215 204.305,16.215 cw(c204.305,15.736) 204.785,15.736 204.785,15.059 cw(c204.305,15.059) 204.305,14.58 201.133,14.58 ccw(c201.133,14.355) 200.907,14.355 200.907,12.783 200.907,12.461 198.467,10.02 198.467,8.633 198.973,8.127 205.504,8.127 205.816,7.814 205.816,7.534 T_J4.G5@206.4,6.95
  L4 w0.127: T_R41.1@193.796,32.808 193.796,32.788 194.023,32.562 194.043,32.562 194.12,32.484 194.525,32.484 194.716,32.484 ccw(c194.716,32.71) 194.941,32.71 194.941,36.105 cw(c195.42,36.105) 195.42,36.584 196.097,36.584 cw(c196.097,36.105) 196.576,36.105 196.576,31.127 ccw(c196.801,31.127) 196.801,30.901 197.478,30.901 ccw(c197.478,31.127) 197.703,31.127 197.703,34.367 cw(c198.182,34.367) 198.182,34.846 198.859,34.846 cw(c198.859,34.367) 199.338,34.367 199.338,32.71 ccw(c199.563,32.71) 199.563,32.484 200.391,32.484 200.475,32.4 200.907,31.968 200.907,31.2 201.083,31.024 v1(201.094,31.024)
BP_IO.LVDS_P7: T_J4.E6 T_R42.1 | length 83.8
  L1 w0.127: v1(203.401,30.131) 203.401,30.121 203.578,29.944 204.878,29.944 208.716,26.106 208.716,25.289 208.716,25.098 ccw(c208.942,25.098) 208.942,24.873 211.737,24.873 cw(c211.737,24.393) 212.217,24.393 212.217,23.717 cw(c211.737,23.717) 211.737,23.238 207.154,23.238 ccw(c207.154,23.012) 206.929,23.012 206.929,22.336 ccw(c207.154,22.336) 207.154,22.111 211.737,22.111 cw(c211.737,21.631) 212.217,21.631 212.217,20.955 cw(c211.737,20.955) 211.737,20.476 207.154,20.476 ccw(c207.154,20.25) 206.929,20.25 206.929,19.574 ccw(c207.154,19.574) 207.154,19.349 211.737,19.349 cw(c211.737,18.869) 212.217,18.869 212.217,18.193 cw(c211.737,18.193) 211.737,17.714 207.154,17.714 ccw(c207.154,17.488) 206.929,17.488 206.929,16.812 ccw(c207.154,16.812) 207.154,16.587 211.737,16.587 cw(c211.737,16.107) 212.217,16.107 212.217,15.431 cw(c211.737,15.431) 211.737,14.952 207.154,14.952 ccw(c207.154,14.726) 206.929,14.726 206.929,14.05 ccw(c207.154,14.05) 207.154,13.825 211.737,13.825 cw(c211.737,13.345) 212.217,13.345 212.217,12.669 cw(c211.737,12.669) 211.737,12.19 207.154,12.19 ccw(c207.154,11.964) 206.929,11.964 206.929,11.288 ccw(c207.154,11.288) 207.154,11.063 208.237,11.063 cw(c208.237,10.583) 208.716,10.583 208.716,10.004 208.716,9.534 T_J4.E6@209.3,8.95
  L4 w0.127: T_R42.1@193.796,30.268 193.796,30.248 194.023,30.022 194.043,30.022 194.12,29.944 203.225,29.944 203.401,30.121 v1(203.401,30.131)
BP_IO.LVDS_P8: T_J4.B6 T_R43.1 | length 84.5
  L4 w0.127: T_R43.1@178.796,55.668 178.796,55.648 179.022,55.422 179.042,55.422 179.12,55.344 179.364,55.344 180.273,56.253 180.273,58.585 183.491,61.803 188.409,61.803 188.599,61.803 ccw(c188.599,62.028) 188.825,62.028 188.825,62.309 cw(c189.304,62.309) 189.304,62.788 189.98,62.788 cw(c189.98,62.309) 190.46,62.309 190.46,61.967 ccw(c190.685,61.967) 190.685,61.741 191.361,61.741 ccw(c191.361,61.967) 191.587,61.967 191.587,62.309 cw(c192.066,62.309) 192.066,62.788 192.742,62.788 cw(c192.742,62.309) 193.222,62.309 193.222,62.028 ccw(c193.447,62.028) 193.447,61.803 195.128,61.803 196.194,61.803 201.854,56.143 201.854,42.871 212.947,31.778 212.947,9.531 213.5,8.978 T_J4.B6@213.5,8.95
BP_IO.LVDS_P9: T_J4.K6 T_R44.1 | length 83.8
  L4 w0.127: T_R44.1@178.796,53.128 178.796,53.108 179.022,52.882 179.042,52.882 179.12,52.804 180.857,52.804 181.998,53.945 181.998,58.145 183.307,59.454 196.054,59.454 200.611,54.897 200.611,42.064 209.539,33.136 209.613,33.062 209.613,17.539 202.714,10.639 201.028,10.639 200.347,9.958 200.347,9.531 200.9,8.978 T_J4.K6@200.9,8.95
BP_IO.LVDS_P10: T_J4.H6 T_R45.1 | length 82.7
  L1 w0.127: v1(202.425,37.174) 202.415,37.174 202.239,36.997 202.239,34.469 202.239,34.278 ccw(c202.464,34.278) 202.464,34.053 203.582,34.053 cw(c203.582,33.573) 204.061,33.573 204.061,32.897 cw(c203.582,32.897) 203.582,32.418 202.464,32.418 ccw(c202.464,32.192) 202.239,32.192 202.239,31.538 202.239,28.645 202.957,27.927 203.055,27.829 203.092,27.792 ccw(c203.251,27.952) 203.411,27.792 203.609,27.99 cw(c203.948,27.651) 204.287,27.99 204.765,27.512 cw(c204.426,27.173) 204.802,26.876 204.802,26.871 204.567,26.636 ccw(c204.726,26.477) 204.567,26.317 205.535,25.349 205.632,25.252 205.829,25.055 205.829,11.429 204.516,10.116 204.516,9.534 T_J4.H6@205.1,8.95
  L4 w0.127: T_R45.1@178.796,48.048 178.796,48.028 179.022,47.802 179.042,47.802 179.12,47.724 179.57,47.724 183.516,51.671 183.516,56.735 184.589,57.808 195.91,57.808 199.319,54.399 199.319,41.181 202.239,38.261 202.239,37.35 202.415,37.174 v1(202.425,37.174)
BP_IO.LVDS_P11: T_J5.D1 T_R46.1 | length 83.8
  L4 w0.127: T_R46.1@178.796,42.051 T_R46.1@178.796,42.071 179.022,42.298 179.042,42.298 179.12,42.375 179.523,42.375 180.003,42.855 180.003,43.734 178.595,45.141 173.012,45.141 172.35,45.803 172.35,47.284 172.344,47.289 172.344,56.919 174.7,59.275 178.884,59.275 184.514,64.905 185.499,65.89 cw(c185.658,65.73) 185.818,65.889 ; 185.818,65.889 186.865,64.842 ccw(c187.205,65.18) 187.545,64.843 188.022,65.32 ccw(c187.683,65.659) 188.059,65.956 188.059,65.96 186.939,67.08 cw(c187.098,67.24) 186.939,67.399 187.417,67.877 cw(c187.577,67.718) 187.736,67.877 ; 187.737,67.876 188.818,66.795 ccw(c189.158,67.133) 189.498,66.796 189.975,67.273 ccw(c189.636,67.612) 190.012,67.909 190.012,67.913 188.892,69.033 cw(c189.051,69.193) 188.892,69.352 189.37,69.83 cw(c189.53,69.671) 189.689,69.83 ; 189.69,69.829 190.771,68.748 ccw(c191.111,69.087) 191.451,68.749 191.928,69.226 ccw(c191.589,69.565) 191.965,69.862 191.965,69.866 190.845,70.986 cw(c191.004,71.146) 190.845,71.305 191.323,71.783 cw(c191.483,71.624) 191.642,71.783 ; 191.643,71.782 192.724,70.701 ccw(c193.064,71.04) 193.404,70.702 193.881,71.179 ccw(c193.542,71.518) 193.918,71.815 193.918,71.819 192.833,72.905 cw(c192.992,73.064) 192.833,73.223 192.967,73.358 194.431,74.822 196.005,74.822 209.786,74.822 210.047,75.083 210.047,75.369 210.6,75.922 T_J5.D1@210.6,75.95
BP_IO.LVDS_P12: T_J5.A1 T_R47.1 | length 84.3
  L4 w0.127: T_R47.1@178.796,40.428 178.796,40.408 179.022,40.182 179.042,40.182 179.12,40.104 179.523,40.104 180.003,39.624 180.003,38.746 178.595,37.338 172.701,37.338 170.621,39.418 170.621,57.455 174.237,61.071 178.082,61.071 194.09,77.078 213.986,77.078 214.247,76.817 214.247,76.531 214.8,75.978 T_J5.A1@214.8,75.95
BP_IO.LVDS_P13: T_J5.J1
BP_IO.LVDS_P14: T_J5.G1
BP_IO.LVDS_P15: T_J4.E2
BP_MGT_Rx_N: T_J4.E5
BP_MGT_Rx_P: T_J4.D5
BP_MGT_Tx_N: T_J4.B5
BP_MGT_Tx_P: T_J4.A5
CT: T_C14.2 T_C15.2 T_C16.2 T_C17.2 T_C18.2 T_C19.2 T_IC7.4 | length 13.8
  L1 w0.254: T_IC7.4@167.869,12.086 168.022,12.239 169.658,12.239 ; T_C19.2@170.609,11.4 T_C18.2@169.658,11.4 169.658,12.239 ; T_C15.2@170.609,13.077 T_C16.2@169.658,13.077 169.658,12.239 ; T_C14.2@175.542,13.077 175.542,12.254 175.527,12.239 ; T_C17.2@176.493,11.4 176.493,12.057 176.311,12.239 175.527,12.239 ; 169.658,12.239 175.527,12.239
EEM0_I2C.SCL: rT_J1.27 T_D1.3 T_IC2.1 T_IC3.6 T_IC6.2 T_IC8.3 T_IC9.6 | length 157.3
  L1 w0.152: T_IC9.6@125.575,3.3 127.063,3.3 v1(127.1,3.263) 127.1,2.17 131.495,-2.225 174.575,-2.225 175.975,-0.825 175.975,1.781 176.528,2.334 ; v1(128.852,3.263) 132.563,3.263 136.558,7.258 136.558,38.648 137.51,39.6 142.269,39.6 143.929,41.259 143.929,43.766 143.327,44.367 T_IC6.2@141.875,44.367 ; v1(177.275,7.825) 177.271,7.825 176.618,7.172 T_IC3.6@176.618,5.984 176.618,4.964 176.255,4.601 176.255,2.608 176.528,2.334 ; T_D1.3@182.937,19.75 T_D1.3@183.175,19.75 ; T_IC8.3@183.616,4.958 182.21,4.958 181.425,5.743 181.425,6.425 180.961,6.889 179.314,6.889 179.042,6.617 179.042,3.095 178.281,2.334 T_IC2.1@177.283,2.334 176.528,2.334 ; v1(183.714,19.243) 183.714,19.625 183.589,19.75 T_D1.3@183.175,19.75 ; rT_J1.27@188.73,23.46 187,21.73 187,20.175 186.175,19.35 184.775,19.35 183.9,20.225 183.375,20.225 183.175,20.025 T_D1.3@183.175,19.75
  L4 w0.152: v1(127.1,3.263) v1(128.852,3.263) ; v1(177.275,7.825) 177.275,14.972 179.055,16.751 182.026,16.751 183.714,18.439 v1(183.714,19.243)
EEM0_I2C.SDA: rT_J1.26 T_D1.1 T_IC2.3 T_IC3.5 T_IC6.1 T_IC8.2 T_IC9.7 | length 159.5
  L1 w0.152: T_IC9.7@125.575,3.7 126.725,3.7 126.776,3.75 v1(127.6,3.75) 127.6,2.378 131.653,-1.675 173.9,-1.675 174.71,-0.865 174.71,1.435 174.969,1.694 175.27,1.694 175.75,2.174 175.75,4.75 175.975,4.975 175.975,7.525 176.818,8.368 v1(177.888,8.368) T_IC3.5@177.888,5.984 177.888,4.937 177.757,4.806 177.757,4.458 T_IC2.3@177.533,4.234 ; v1(129.3,3.75) 132.367,3.75 136.075,7.458 136.075,39.084 137.24,40.25 142,40.25 143.279,41.529 143.279,43.496 143.058,43.717 T_IC6.1@141.875,43.717 ; T_IC2.3@177.283,4.234 T_IC2.3@177.533,4.234 ; T_D1.1@182.937,18.75 T_D1.1@183.102,18.75 ; v1(183.188,17.25) 183.188,18.663 T_D1.1@183.102,18.75 ; T_IC8.2@183.616,5.358 182.517,5.358 181.925,5.95 181.925,6.632 181.097,7.461 179.081,7.461 178.6,6.979 178.6,4.523 178.311,4.234 T_IC2.3@177.533,4.234 ; rT_J1.26@191.27,26 189.94,24.67 189.94,23.215 189.2,22.475 188.288,22.475 187.475,21.662 187.475,19.756 186.469,18.75 T_D1.1@183.102,18.75
  L4 w0.152: v1(127.6,3.75) v1(129.3,3.75) ; v1(177.888,8.368) 177.888,14.838 179.35,16.3 182.238,16.3 v1(183.188,17.25)
EEM0_INT_I2C.SCL: IC3.14 T_IC9.3 T_R68.1 | length 5.2
  L1 w0.152: IC3.14@120.255,5.061 T_R68.1@121.98,5.061 121.98,4.525 122.805,3.7 T_IC9.3@124.625,3.7
EEM0_INT_I2C.SDA: IC3.15 T_IC9.2 T_R67.1 | length 5.8
  L1 w0.152: IC3.15@120.255,6.331 T_R67.1@121.98,6.331 121.98,6.311 122.616,5.675 123.3,5.675 123.525,5.45 123.525,4.573 123.998,4.1 T_IC9.2@124.625,4.1
EEM1_I2C.SCL: T_D1.6 T_IC4.1 T_IC5.6 T_J2.27 | length 39.3
  L1 w0.152: T_IC4.1@168.528,2.334 167.773,2.334 167.499,2.608 167.499,4.601 167.863,4.964 T_IC5.6@167.863,5.984 167.863,7.172 168.165,7.475 169.025,7.475 169.493,7.943 v1(170.691,7.943) ; T_J2.27@173.73,23.46 173.88,23.46 175.095,24.675 177.051,24.675 178.057,23.669 178.057,20.872 180.179,18.75 T_D1.6@181.252,18.75 ; v1(179.79,17.9) 180.675,17.9 181.165,18.39 181.165,18.663 T_D1.6@181.252,18.75 ; T_D1.6@181.417,18.75 T_D1.6@181.252,18.75
  L4 w0.152: v1(170.691,7.943) 173.543,7.943 176.223,10.623 176.223,15.442 178.681,17.9 v1(179.79,17.9)
EEM1_I2C.SDA: T_D1.4 T_IC4.3 T_IC5.5 T_J2.26 | length 34.1
  L1 w0.152: T_IC4.3@168.528,4.234 168.778,4.234 169.001,4.458 169.001,4.806 169.133,4.937 T_IC5.5@169.133,5.984 169.133,7.058 169.547,7.472 v1(170.195,7.472) ; T_J2.26@176.27,26 176.42,26 178.475,23.945 178.475,21.124 179.399,20.2 181.05,20.2 181.178,20.072 T_D1.4@181.178,19.75 ; v1(180.639,19.243) 180.639,19.625 180.764,19.75 T_D1.4@181.178,19.75 ; T_D1.4@181.417,19.75 T_D1.4@181.178,19.75
  L4 w0.152: v1(170.195,7.472) 173.747,7.472 176.7,10.425 176.7,15.244 178.756,17.3 180.275,17.3 180.639,17.664 v1(180.639,19.243)
EEM_IO.LVDS_N0: IC4.1 R14.1 rT_J1.3 T_R51.2 | length 31.5
  L1 w0.127: R14.1@183.387,56.114 183.044,55.771 183.044,55.438 183.251,55.231 183.476,55.231 185.048,55.231 cw(c185.048,54.752) 185.527,54.752 185.527,54.423 ccw(c185.753,54.423) 185.753,54.198 186.429,54.198 ccw(c186.429,54.423) 186.654,54.423 186.654,58.696 cw(c187.134,58.696) 187.134,59.176 187.81,59.176 cw(c187.81,58.696) 188.289,58.696 188.289,58.458 ccw(c188.515,58.458) 188.515,58.233 188.966,58.233 189.104,58.233 192.221,58.233 193.012,57.442 193.012,55.726 192.376,55.09 192.279,55.09 192.276,55.087 190.746,55.087 190.528,54.869 190.128,54.869 189.978,55.019 189.809,55.019 rT_J1.3@188.73,53.94 ; R14.1@183.387,56.134 183.161,56.36 183.119,56.36 183.044,56.435 183.044,57.026 183.183,57.164 IC4.1@184.467,57.164
  L4 w0.127: rT_J1.3@188.73,53.94 189.858,55.068 189.963,55.068 190.112,54.919 190.6,54.919 190.771,55.09 192.535,55.09 192.856,54.769 T_R51.2@192.856,54.749
EEM_IO.LVDS_N1: IC5.5 rT_J1.6 T_R52.2 | length 32
  L1 w0.127: IC5.5@167.478,50.994 167.478,50.719 167.355,50.596 167.355,50.384 167.52,50.219 177.138,50.219 179.721,52.801 189.699,52.801 190.152,52.347 190.152,51.52 190.272,51.4 rT_J1.6@191.27,51.4
  L4 w0.127: rT_J1.6@191.27,51.4 190.287,51.4 190.102,51.586 190.102,52.242 190.41,52.55 190.498,52.55 191.189,52.55 cw(c191.189,52.423) 191.316,52.423 191.316,52.416 ccw(c191.441,52.416) 191.441,52.291 191.817,52.291 ccw(c191.817,52.416) 191.943,52.416 191.943,52.423 cw(c192.07,52.423) 192.07,52.55 192.535,52.55 192.566,52.519 192.856,52.229 T_R52.2@192.856,52.209
EEM_IO.LVDS_N2: IC6.4 R15.1 rT_J1.9 T_R53.2 | length 25.4
  L1 w0.127: IC6.4@183.127,51.27 183.127,50.274 183.303,50.098 184.065,50.098 184.407,50.44 R15.1@184.427,50.44 184.447,50.44 184.788,50.098 185.207,50.098 185.398,50.098 ccw(c185.398,50.323) 185.623,50.323 185.623,51.178 cw(c186.102,51.178) 186.102,51.657 186.779,51.657 cw(c186.779,51.178) 187.258,51.178 187.258,50.468 ccw(c187.483,50.468) 187.483,50.243 188.085,50.243 192.486,50.243 193.025,49.705 193.025,49.49 193.025,47.992 192.53,47.497 192.428,47.497 192.427,47.496 190.849,47.496 190.632,47.279 190.223,47.279 190.073,47.429 189.904,47.429 rT_J1.9@188.825,46.35
  L4 w0.127: rT_J1.9@188.73,46.32 189.858,47.448 189.963,47.448 190.112,47.299 190.6,47.299 190.771,47.47 192.535,47.47 192.856,47.149 T_R53.2@192.856,47.129
EEM_IO.LVDS_N3: IC7.4 R16.1 rT_J1.12 T_R54.2 | length 25.9
  L1 w0.127: IC7.4@183.127,46.02 183.127,45.024 183.303,44.848 184.065,44.848 184.407,45.19 R16.1@184.427,45.19 184.447,45.19 184.788,44.848 185.954,44.848 186.2,45.094 186.2,46.599 185.903,46.896 184.445,46.896 184.37,46.97 184.121,47.22 184.121,48.33 184.52,48.729 187.155,48.729 187.23,48.655 187.589,48.295 187.589,45.543 187.885,45.247 189.633,45.247 189.713,45.167 190.152,44.727 190.152,43.9 190.272,43.78 rT_J1.12@191.27,43.78
  L4 w0.127: rT_J1.12@191.27,43.78 190.287,43.78 190.102,43.966 190.102,44.622 190.41,44.93 192.535,44.93 192.856,44.609 T_R54.2@192.856,44.589
EEM_IO.LVDS_N4: IC8.4 R17.1 rT_J1.15 T_R55.2 | length 25.3
  L1 w0.127: IC8.4@183.127,40.77 183.127,39.774 183.303,39.598 184.065,39.598 184.407,39.94 R17.1@184.427,39.94 184.447,39.94 184.788,39.598 186.543,39.598 187.173,40.228 187.173,41.978 187.805,42.609 192.359,42.609 192.962,42.006 192.962,40.382 192.416,39.836 190.744,39.836 190.537,39.629 190.128,39.629 189.978,39.779 189.809,39.779 rT_J1.15@188.73,38.7
  L4 w0.127: rT_J1.15@188.73,38.7 189.858,39.828 189.963,39.828 190.112,39.679 190.6,39.679 190.771,39.85 192.535,39.85 192.856,39.529 T_R55.2@192.856,39.509
EEM_IO.LVDS_N5: IC9.4 R18.1 rT_J1.18 T_R56.2 | length 24.5
  L1 w0.127: IC9.4@183.127,35.52 183.127,34.524 183.303,34.348 184.065,34.348 184.407,34.69 184.447,34.69 184.788,34.348 186.916,34.348 187.225,34.657 187.225,35.458 186.937,35.746 184.231,35.746 183.92,36.056 183.92,37.134 184.069,37.283 184.193,37.407 184.342,37.555 186.115,37.555 189.704,37.555 189.801,37.459 190.152,37.107 190.152,36.28 190.272,36.16 rT_J1.18@191.27,36.16
  L4 w0.127: rT_J1.18@191.27,36.16 190.287,36.16 190.102,36.346 190.102,37.002 190.41,37.31 192.535,37.31 192.856,36.989 T_R56.2@192.856,36.969
EEM_IO.LVDS_N6: IC10.3 rT_J1.21 T_R57.2 | length 24.6
  L1 w0.127: IC10.3@183.127,27.67 183.127,28.617 183.325,28.816 183.7,28.816 183.9,28.616 183.9,27.12 184.34,26.68 186.165,26.68 186.605,27.119 186.605,28.725 186.605,28.916 ccw(c186.125,28.916) 186.125,29.395 184.952,29.395 cw(c184.952,29.62) 184.727,29.62 184.727,30.297 cw(c184.952,30.297) 184.952,30.522 186.125,30.522 ccw(c186.125,31.001) 186.605,31.001 186.605,31.591 186.605,31.606 187.149,32.151 187.255,32.256 187.776,32.256 cw(c187.776,32.129) 187.903,32.129 187.903,32.096 ccw(c188.028,32.096) 188.028,31.971 188.404,31.971 ccw(c188.404,32.096) 188.53,32.096 188.53,32.129 cw(c188.657,32.129) 188.657,32.256 189.02,32.256 189.387,32.256 189.522,32.391 189.708,32.391 189.822,32.277 189.822,32.172 rT_J1.21@188.73,31.08
  L4 w0.127: rT_J1.21@188.73,31.08 189.858,32.208 189.963,32.208 190.112,32.059 190.6,32.059 190.771,32.23 192.535,32.23 192.856,31.909 T_R57.2@192.856,31.889
EEM_IO.LVDS_N7: IC11.4 R19.1 rT_J1.24 T_R58.2 | length 30.4
  L1 w0.127: IC11.4@183.127,25.02 183.127,24.024 183.303,23.848 184.065,23.848 184.407,24.19 R19.1@184.427,24.19 184.447,24.19 184.79,23.847 185.143,23.847 185.424,23.566 185.424,22.958 184.45,21.984 184.45,21.583 184.708,21.325 185.821,21.325 186.096,21.6 186.096,22.302 186.245,22.45 187.31,23.516 187.31,23.973 187.31,24.163 ccw(c187.085,24.163) 187.085,24.389 185.661,24.389 cw(c185.661,24.868) 185.181,24.868 185.181,25.544 cw(c185.661,25.544) 185.661,26.024 187.085,26.024 ccw(c187.085,26.249) 187.31,26.249 187.31,26.8 187.31,29.5 187.459,29.649 187.729,29.919 187.878,30.068 189.74,30.068 189.889,29.919 190.004,29.804 190.152,29.655 190.152,28.66 190.272,28.54 rT_J1.24@191.27,28.54
  L4 w0.127: rT_J1.24@191.27,28.54 190.287,28.54 190.102,28.726 190.102,29.382 190.41,29.69 192.535,29.69 192.856,29.369 T_R58.2@192.856,29.349
EEM_IO.LVDS_N8: IC13.5 T_J2.3 T_R59.2 | length 30.8
  L1 w0.127: IC13.5@167.478,58.494 167.478,58.219 167.355,58.096 167.355,57.829 167.547,57.637 167.929,57.637 168.029,57.737 ; 168.029,57.737 ccw(c167.694,58.073) 168.169,58.073 168.169,58.735 cw(c168.648,58.735) 168.648,59.215 169.324,59.215 cw(c169.324,58.735) 169.804,58.735 169.804,57.821 ccw(c170.029,57.821) 170.029,57.595 170.705,57.595 ccw(c170.705,57.821) 170.931,57.821 170.931,58.735 cw(c171.41,58.735) 171.41,59.215 172.086,59.215 cw(c172.086,58.735) 172.566,58.735 172.566,57.85 ccw(c172.791,57.85) 172.791,57.624 173.467,57.624 ccw(c173.467,57.85) 173.693,57.85 173.693,58.735 cw(c174.172,58.735) 174.172,59.215 174.848,59.215 cw(c174.848,58.735) 175.328,58.735 175.328,58.264 ccw(c175.553,58.264) 175.553,58.039 176.152,58.039 177.102,58.039 177.251,57.89 177.742,57.398 178.035,57.105 178.11,57.031 178.11,55.564 177.961,55.415 177.613,55.067 177.464,54.919 175.111,54.919 174.963,55.067 174.857,55.067 T_J2.3@173.73,53.94
  L4 w0.127: T_J2.3@173.73,53.94 174.857,55.067 174.963,55.067 175.111,54.919 175.599,54.919 175.771,55.09 177.534,55.09 177.856,54.769 T_R59.2@177.856,54.749
EEM_IO.LVDS_N9: IC14.5 T_J2.6 T_R60.2 | length 38.2
  L1 w0.127: IC14.5@161.978,53.994 161.978,53.719 161.855,53.596 161.855,53.329 162.047,53.137 162.401,53.137 162.591,53.137 ccw(c162.591,53.342) 162.797,53.342 162.797,55.34 cw(c163.256,55.34) 163.256,55.8 163.872,55.8 cw(c163.872,55.34) 164.332,55.34 164.332,52.994 ccw(c164.537,52.994) 164.537,52.789 165.153,52.789 ccw(c165.153,52.994) 165.359,52.994 165.359,54.074 cw(c165.818,54.074) 165.818,54.533 166.434,54.533 cw(c166.434,54.074) 166.894,54.074 166.894,53.129 ccw(c167.099,53.129) 167.099,52.924 167.715,52.924 ccw(c167.715,53.129) 167.921,53.129 167.921,54.074 cw(c168.38,54.074) 168.38,54.533 168.996,54.533 cw(c168.996,54.074) 169.456,54.074 169.456,52.943 ccw(c169.661,52.943) 169.661,52.737 170.277,52.737 ccw(c170.277,52.943) 170.483,52.943 170.483,55.85 cw(c170.942,55.85) 170.942,56.31 171.558,56.31 cw(c171.558,55.85) 172.018,55.85 172.018,53.342 ccw(c172.223,53.342) 172.223,53.137 172.823,53.137 173.19,52.769 173.548,52.769 174.628,52.769 175.127,52.27 175.127,51.474 175.201,51.4 T_J2.6@176.27,51.4
  L4 w0.127: T_J2.6@176.27,51.4 175.287,51.4 175.101,51.585 175.101,52.242 175.41,52.55 177.534,52.55 177.856,52.229 T_R60.2@177.856,52.209
EEM_IO.LVDS_N10: IC15.5 T_J2.9 T_R61.2 | length 31.2
  L1 w0.127: IC15.5@161.977,46.494 161.977,46.219 161.854,46.096 161.854,45.873 162.016,45.711 162.5,45.711 162.691,45.711 ccw(c162.691,45.936) 162.916,45.936 162.916,46.938 cw(c163.395,46.938) 163.395,47.418 164.072,47.418 cw(c164.072,46.938) 164.551,46.938 164.551,45.901 ccw(c164.776,45.901) 164.776,45.676 165.453,45.676 ccw(c165.453,45.901) 165.678,45.901 165.678,46.554 cw(c166.157,46.554) 166.157,47.034 166.834,47.034 cw(c166.834,46.554) 167.313,46.554 167.313,45.901 ccw(c167.538,45.901) 167.538,45.676 168.215,45.676 ccw(c168.215,45.901) 168.44,45.901 168.44,46.938 cw(c168.919,46.938) 168.919,47.418 169.596,47.418 cw(c169.596,46.938) 170.075,46.938 170.075,45.936 ccw(c170.3,45.936) 170.3,45.711 171.02,45.711 171.181,45.711 171.749,45.143 171.901,45.143 171.964,45.143 ccw(c171.964,45.27) 172.091,45.27 172.091,45.59 cw(c172.216,45.59) 172.216,45.716 172.593,45.716 cw(c172.593,45.59) 172.718,45.59 172.718,45.27 ccw(c172.845,45.27) 172.845,45.143 173.378,45.143 174.066,45.143 174.845,45.922 174.845,46.835 175.037,47.027 175.037,47.373 174.963,47.447 174.857,47.447 T_J2.9@173.73,46.32
  L4 w0.127: T_J2.9@173.73,46.32 174.857,47.447 174.963,47.447 175.111,47.299 175.599,47.299 175.771,47.47 177.534,47.47 177.856,47.149 T_R61.2@177.856,47.129
EEM_IO.LVDS_N11: IC16.5 T_J2.12 T_R62.2 | length 31.7
  L1 w0.127: IC16.5@167.478,43.495 167.478,43.22 167.355,43.097 167.355,42.83 167.517,42.668 167.624,42.668 167.815,42.668 ccw(c167.815,42.893) 168.04,42.893 168.04,43.289 cw(c168.519,43.289) 168.519,43.768 169.196,43.768 cw(c169.196,43.289) 169.675,43.289 169.675,39.397 ccw(c169.9,39.397) 169.9,39.172 170.577,39.172 ccw(c170.577,39.397) 170.802,39.397 170.802,42.188 cw(c171.281,42.188) 171.281,42.668 171.897,42.668 172.088,42.668 172.151,42.668 ccw(c172.151,42.795) 172.278,42.795 172.278,42.891 cw(c172.404,42.891) 172.404,43.016 172.78,43.016 cw(c172.78,42.891) 172.905,42.891 172.905,42.795 ccw(c173.032,42.795) 173.032,42.668 173.344,42.668 174.503,42.668 174.567,42.668 ccw(c174.567,42.795) 174.694,42.795 174.694,43.258 cw(c174.819,43.258) 174.819,43.383 175.195,43.383 cw(c175.195,43.258) 175.321,43.258 175.321,42.795 ccw(c175.448,42.795) 175.448,42.668 175.971,42.668 176.854,42.668 177.459,43.272 177.459,44.377 176.95,44.886 175.485,44.886 175.127,44.528 175.127,43.854 175.201,43.78 T_J2.12@176.27,43.78
  L4 w0.127: T_J2.12@176.27,43.78 175.287,43.78 175.101,43.594 175.101,42.938 175.41,42.629 177.534,42.629 177.856,42.951 T_R62.2@177.856,42.971
EEM_IO.LVDS_N12: IC17.5 T_J2.15 T_R63.2 | length 30.5
  L1 w0.127: IC17.5@161.977,38.995 161.977,38.72 161.854,38.597 161.854,38.33 162.586,37.597 162.777,37.597 162.968,37.597 ccw(c162.968,37.823) 163.193,37.823 163.193,38.64 cw(c163.673,38.64) 163.673,39.12 164.349,39.12 cw(c164.349,38.64) 164.828,38.64 164.828,36.775 ccw(c165.054,36.775) 165.054,36.549 165.73,36.549 ccw(c165.73,36.775) 165.955,36.775 165.955,38.64 cw(c166.435,38.64) 166.435,39.12 167.111,39.12 cw(c167.111,38.64) 167.59,38.64 167.59,37.823 ccw(c167.816,37.823) 167.816,37.597 168.432,37.597 171.908,37.597 171.972,37.597 ccw(c171.972,37.724) 172.099,37.724 172.099,38.078 cw(c172.224,38.078) 172.224,38.203 172.6,38.203 cw(c172.6,38.078) 172.726,38.078 172.726,37.724 ccw(c172.853,37.724) 172.853,37.597 173.085,37.597 174.124,37.597 174.879,38.352 174.879,39.239 175.037,39.397 175.037,39.753 174.963,39.827 174.857,39.827 T_J2.15@173.73,38.7
  L4 w0.127: T_J2.15@173.73,38.7 174.857,39.827 174.963,39.827 175.111,39.679 175.599,39.679 175.771,39.85 177.534,39.85 177.856,39.529 T_R63.2@177.856,39.509
EEM_IO.LVDS_N13: T_J2.18
EEM_IO.LVDS_N14: T_J2.21
EEM_IO.LVDS_N15: T_J2.24
EEM_IO.LVDS_P0: IC4.8 R14.2 rT_J1.2 T_R35.2 | length 31.4
  L1 w0.127: IC4.8@181.367,57.164 182.657,57.164 182.79,57.03 182.79,56.435 182.716,56.36 182.674,56.36 R14.2@182.447,56.134 ; R14.2@182.447,56.114 182.79,55.771 182.79,55.332 183.146,54.977 183.476,54.977 185.048,54.977 cw(c185.048,54.752) 185.273,54.752 185.273,54.423 ccw(c185.753,54.423) 185.753,53.944 186.429,53.944 ccw(c186.429,54.423) 186.908,54.423 186.908,58.696 cw(c187.134,58.696) 187.134,58.922 187.81,58.922 cw(c187.81,58.696) 188.035,58.696 188.035,58.458 ccw(c188.515,58.458) 188.515,57.979 188.966,57.979 189.104,57.979 192.115,57.979 192.443,57.65 192.758,57.336 192.758,57.054 192.664,56.96 192.412,56.96 192.318,56.866 192.318,56.427 192.412,56.333 192.664,56.333 192.758,56.239 192.758,55.831 192.458,55.532 192.271,55.344 190.628,55.344 190.453,55.169 190.292,55.169 190.178,55.283 190.178,55.388 rT_J1.2@191.27,56.48
  L4 w0.127: rT_J1.2@191.27,56.48 191.12,56.48 190.142,55.502 190.142,55.247 190.217,55.173 190.495,55.173 190.666,55.344 192.532,55.344 192.61,55.422 192.63,55.422 192.856,55.648 T_R35.2@192.856,55.668
EEM_IO.LVDS_P1: IC5.6 rT_J1.5 T_R36.2 | length 32.1
  L1 w0.127: IC5.6@166.978,50.994 166.978,50.719 167.101,50.596 167.101,50.279 167.415,49.965 177.244,49.965 179.815,52.536 189.605,52.536 189.898,52.242 189.898,51.586 189.713,51.4 rT_J1.5@188.73,51.4
  L4 w0.127: rT_J1.5@188.73,51.4 189.728,51.4 189.848,51.52 189.848,52.347 190.305,52.804 192.532,52.804 192.609,52.882 192.629,52.882 192.856,53.108 T_R36.2@192.856,53.128